# Altium PCB BP_PCB.PcbDoc
Units mil, origin at the board's own origin, x right, y up, seen from the top; angles counter-clockwise.
Board outline 10200 x 7645 mil, 2 copper layers (Top Layer, Bottom Layer); 45 components, 28 nets, 116 pads, 31 vias.
Unrouted connection lines stored in the file: 1.
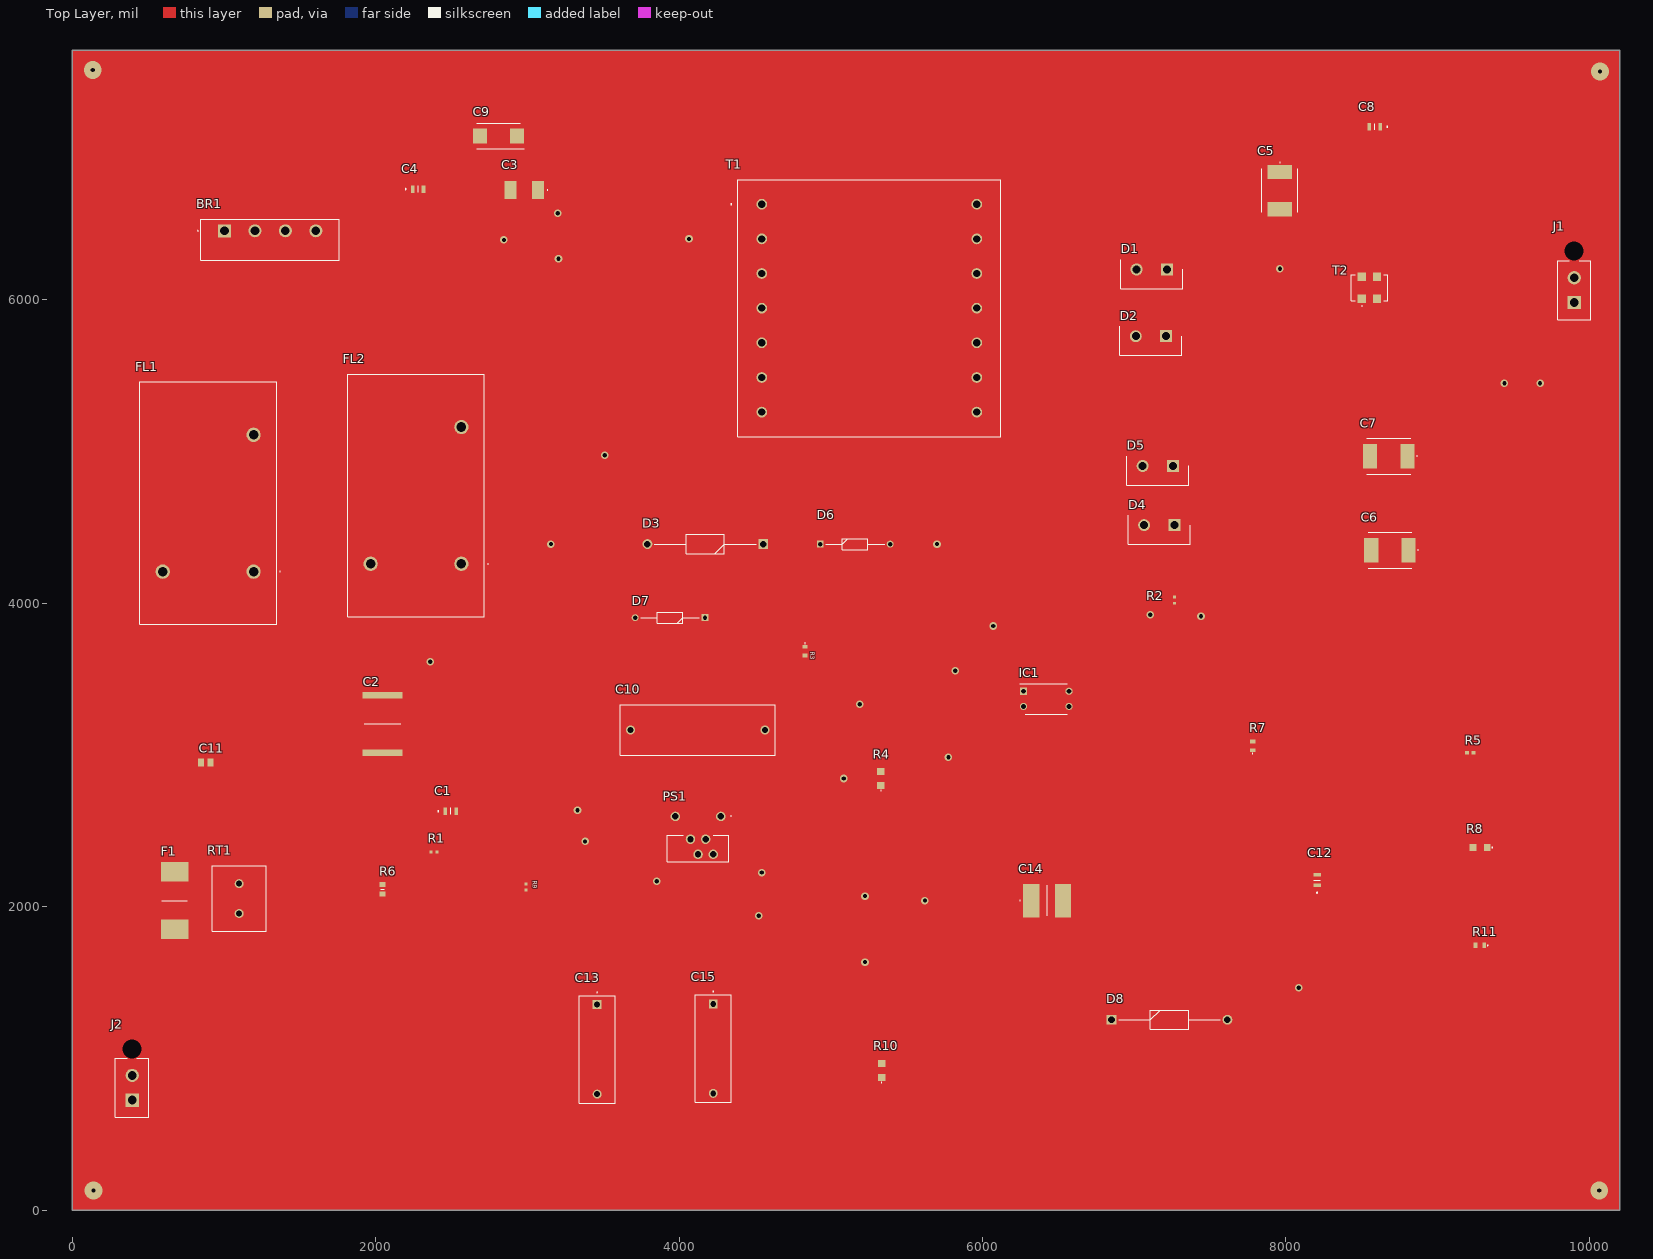
[diagram p0: Top Layer view]
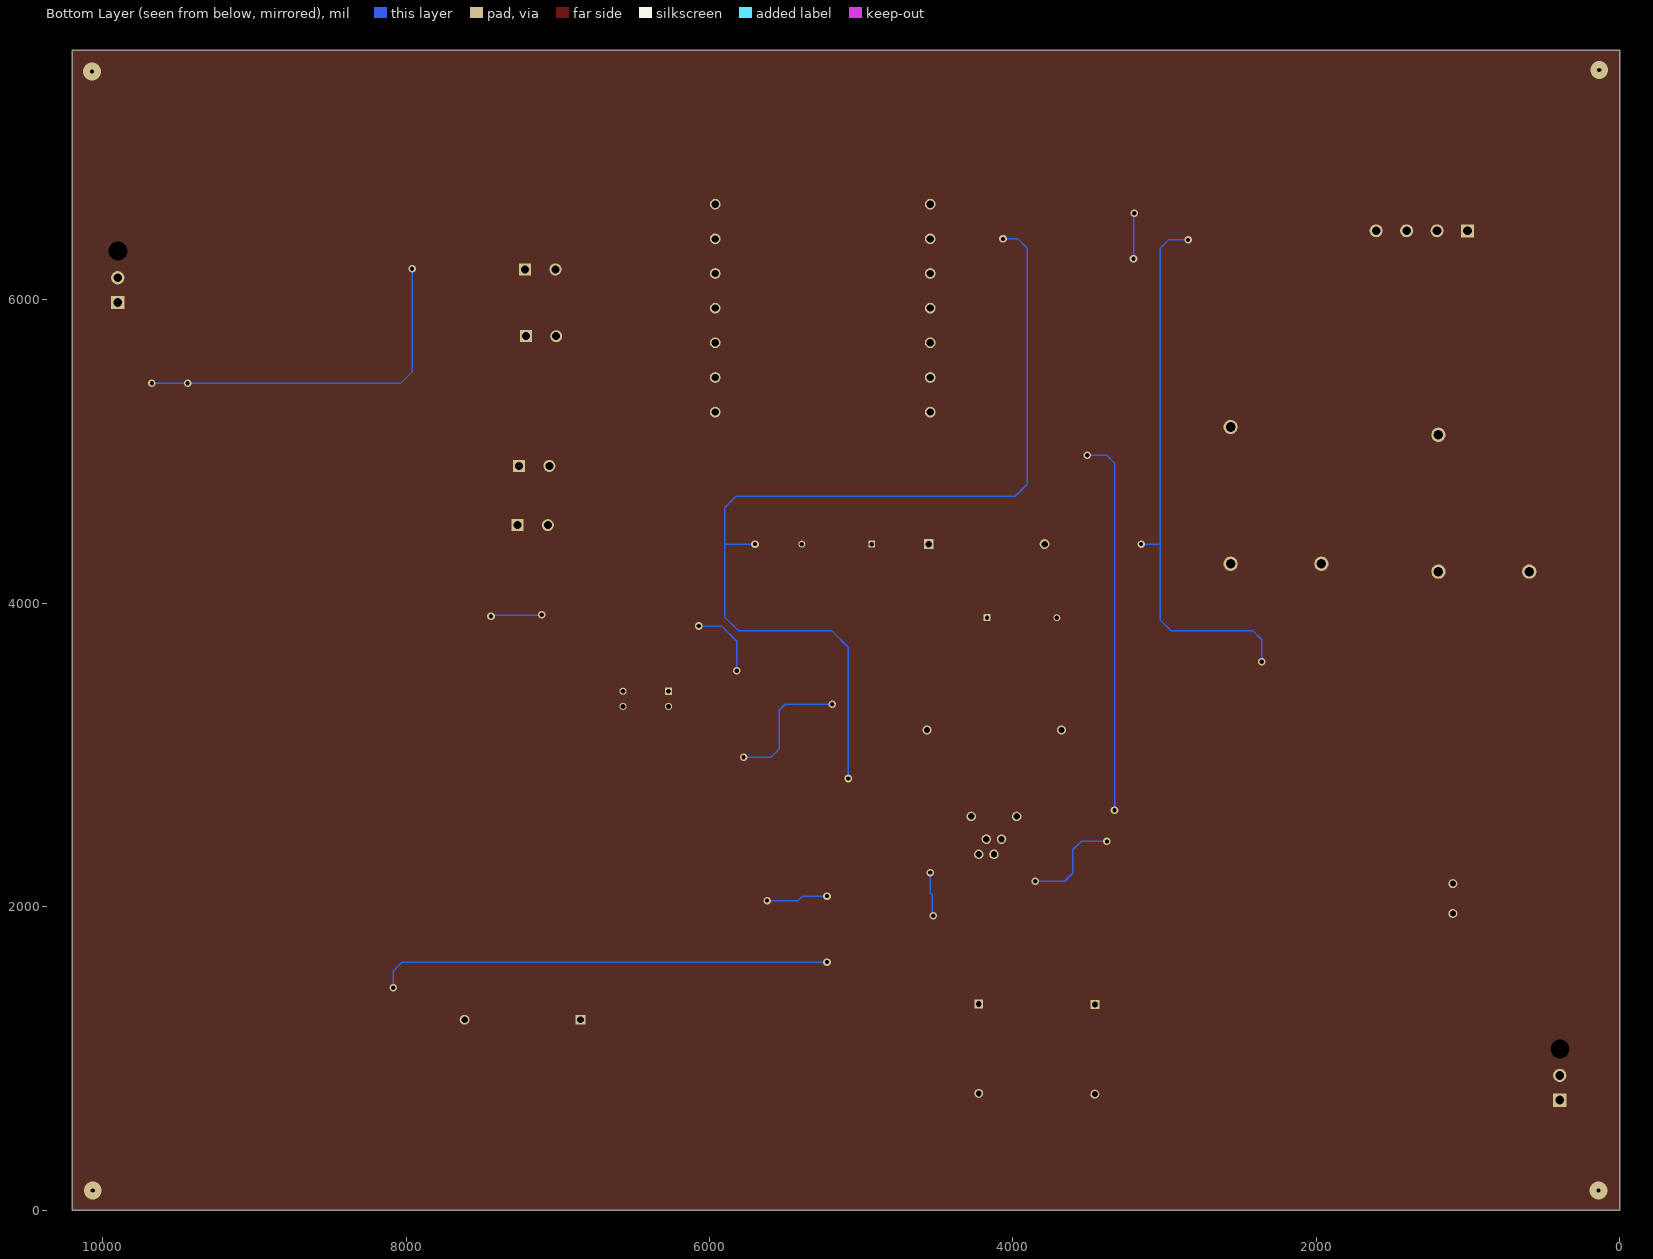
[diagram p1: Bottom Layer view, seen from below]

## Layer stack, top to bottom
Top Solder: solder mask 0.4, Solder Resist, Dk 3.5
Top Layer: signal copper 1.4
Dielectric 1: dielectric 12.6, FR-4, Dk 4.8
Bottom Layer: signal copper 1.4
Bottom Solder: solder mask 0.4, Solder Resist, Dk 3.5

## Board outline
0,0 0,7645 10200,7645 10200,0

## Design rules (kind name [scope] priority, off if disabled: settings)
Clearance [All] p1: gap=10 ignorepadtopadclearanceinfootprint=FALSE
PolygonConnect [All] p1: connectstyle=Relief reliefconductorwidth=10 reliefentries=4 polygonreliefangle="90 Angle" airgapwidth=10
RoutingVias [All] p1: holewidth=28 width=50 viastyle="Through Hole" minholewidth=28 minwidth=50 maxholewidth=28 maxwidth=50
SolderMaskExpansion [All] p1: expansion=4 istentingtop=FALSE
Width [All] p1: maxlimit=10 minlimit=10 preferedwidth=10
30 further rules are at their usual default settings.

## Components (designator, comment, footprint, x,y, rotation, side; value= is the part's Value field where it differs from the comment)
BR1 "RS805-BP" RS805BP 1003.43,6455 r180 top
C1 "2.2nF" GRM21x 2495,2630 r0 top
C2 "0.33uF" CAPC9863X510N 2045,3205 r270 top
C3 "0.022uF" ECHU_E1_E2_E3_E3a_4 2980,6725 r180 top
C4 "0.01uF" GRM21x 2280,6730 r0 top
C5 "820uF" T520H 7960,6720 r270 top
C6 "820uF" T520H 8685,4350 r180 top
C7 "820uF" T520H 8677.17,4970 r180 top
C8 "0.01uF" GRM21x 8585,7140 r180 top
C9 "150uF" CAPPM7343X310N 2810,7080 r180 top
C10 "1uF" ECQE4105KF 3680,3165 r0 top
C11 "0.1uF" CAPC2012X135N 880,2950 r0 top
C12 "0.01uF" GRM21x 8205,2175.43 r90 top
C13 "4.7nF" B32652_(18_x_6) 3460,1355 r270 top
C14 "47uF" KR355WD7LG274MH01L 6425,2040 r0 top
C15 "0.1uF" B32652_(18_x_6) 4225,1360 r270 top
D1 "MBR20100" TO508P485X1018X1930-2P 7215,6200 r180 top
D2 "MBR20100" TO508P485X1018X1930-2P 7210,5760 r180 top
D3 "P6KE200A" DIOAD1936W88L640D324 4555,4390 r180 top
D4 "MBR20100" TO508P485X1018X1930-2P 7265,4515 r180 top
D5 "MBR20100" TO508P485X1018X1930-2P 7255,4905 r180 top
D6 "1N4148,133" DIOAD1165W56L425D185 4930,4390 r0 top
D7 "1N4148,133" DIOAD1165W56L425D185 4170.63,3905 r180 top
D8 "P6KE200A" DIOAD1936W88L640D324 6850,1255 r0 top
F1 "3.15A" FUSC12145X450N 675,2040 r90 top
FL1 "820uH" DMT220038L 1195,4208.43 r90 top
FL2 "200uH" DMT220038L 2565,4260 r90 top
IC1 "PC817A" DIP762W60P254L458H450Q4N 6420,3370 r0 top
J1 "1-770166-0" 17701660 9900,5982.01 r90 top
J2 "1-770166-0" 17701660 395,725 r90 top
PS1 "TOP249YN" TOP249YN 4275,2595 r180 top
R1 "2M" ERA2AED122X 2385,2360 r180 top
R2 "270" ERA2AED122X 7265,4020 r90 top
R3 "4.7" ERA3AEB101V 4830,3685 r270 top
R4 "1k" ERJUP6 5330,2845 r90 top
R5 "31.6K" RESC1005X37N 9215,3015 r0 top
R6 "13MOhm" RESC1608X55N 2045,2115 r90 top
R7 "6.8" ERA3AEB101V 7780,3060 r90 top
R8 "562Ohm" ERJUP6 9280,2390 r180 top
R9 "20.5K" ERA2AED122X 2990,2130 r270 top
R10 "56k" ERJUP6 5335,921.26 r90 top
R11 "4.75K" ERA3AEB101V 9278.54,1745 r180 top
RT1 "10 Ohm" 10D207LD 1100,1955 r90 top
T1 "760895651" 760895651 4545,6630.04 r0 top
T2 "TRS1-182-75-3+" TRS1182753 8550,6080 r90 top

## Footprints (in the part's own frame and the unit in brackets; to place one, negate y for a bottom-side part, rotate by r counter-clockwise, add the part's x,y. Pads: shape width x height; smd on the part's side, far side on the other; paste and mask are expansions set on the pad)
10D207LD [mm]
  round 1.5 hole 1: 1(0,0) 2(5,0)
  silkscreen extent -3,-4.5 8,4.5, body extent -3,-4.5 8,4.5, height 13.1
17701660 [mm]
  rect 2.22x2.22 hole 1.48: 1(0,0)
  round 2.22 hole 1.48: 2(4.14,0)
  round 1.59 hole 3.18 unplated: 3(8.59,0)
  silkscreen extent -2.85,-2.8 6.98,2.8, body extent -4.01,-3.67 9.68,2.68, height 14.29
760895651 [mm]
  round 1.8 hole 1.2: 1(0,0) 2(0,-5.8) 3(0,-11.6) 4(0,-17.4) 5(0,-23.2) 6(0,-29) 7(0,-34.8) 8(36,-34.8) 9(36,-29) 10(36,-23.2) 11(36,-17.4) 12(36,-11.6) 13(36,-5.8) 14(36,0)
  silkscreen extent -5.2,-38.9 40,4.1, body extent -4,-38.9 40,4.1, height 30.1
B32652_(18_x_6) [mm]
  rect 1.5x1.5 hole 1: 1(0,0)
  round 1.5 hole 1: 2(15,0)
  silkscreen extent -2.1,-3 16.5,3, body extent -1.5,-3 16.5,3, height 11.1
CAPC2012X135N [mm]
  rect 0.96x1.39 smd: 1(-0.79,0) 2(0.79,0)
  body extent -1,-0.63 1,0.63, height 1.35
CAPC9863X510N [mm]
  rect 1.1x6.71 smd: 1(-4.81,0) 2(4.81,0)
  silkscreen extent 0,-3.05 0,3.05, body extent -4.55,-3.09 4.55,3.09, height 5.05
CAPPM7343X310N [mm]
  rect 2.35x2.45 smd: 1(-3.1,0) 2(3.1,0)
  silkscreen extent -4.28,-2.15 3.65,2.15, body extent -3.59,-2.21 3.6,2.21, height 2.92
DIOAD1165W56L425D185 [mm]
  rect 1.15x1.15 hole 0.75: 1(0,0)
  round 1.15 hole 0.75: 2(11.7,0)
  silkscreen extent 0.92,-0.92 10.78,0.92, body extent 0.96,1.69 2.67,3.39, height 32.04
DIOAD1936W88L640D324 [mm]
  rect 1.65x1.65 hole 1.1: 1(0,0)
  round 1.65 hole 1.1: 2(19.4,0)
  silkscreen extent 1.17,-1.62 18.23,1.62, body extent -0.38,-1.61 19.78,1.61, height 3.38
DIP762W60P254L458H450Q4N [mm]
  rect 1.2x1.2 hole 0.8: 1(-3.81,1.27)
  round 1.2 hole 0.8: 2(-3.81,-1.27) 3(3.81,-1.27) 4(3.81,1.27)
  silkscreen extent -4.41,-2.54 3.5,2.54, body extent -3.96,-2.29 3.96,2.29, height 4.5
DMT220038L [mm]
  round 2.4 hole 1.6: 1(0,0) 4(0,15.2) MH1(22.9,0)
  silkscreen extent -8.85,-4.5 31.75,19.05, body extent 0,0 0,0
ECHU_E1_E2_E3_E3a_4 [mm]
  rect 2x3 smd: 1(-2.3,0) 2(2.3,0)
  silkscreen extent -3.95,-0.05 -3.85,0.05, body extent -2.4,-1.65 2.4,1.65, height 2
ECQE4105KF [mm]
  round 1.5 hole 1: 1(0,0) 2(22.5,0)
  silkscreen extent -1.75,-4.25 24.25,4.25, body extent -1.75,-4.25 24.25,4.25, height 18.1
ERA2AED122X [mm]
  rect 0.475x0.5 smd: 1(-0.512,0) 2(0.512,0)
  body extent -0.5,-0.25 0.5,0.25, height 0.35
ERA3AEB101V [mm]
  rect 0.65x0.9 smd: 1(-0.725,0) 2(0.725,0)
  silkscreen extent -1.35,-0.05 -1.25,0.05, body extent -0.8,-0.4 0.8,0.4, height 0.45
ERJUP6 [mm]
  rect 1.15x1.25 smd: 1(-1.175,0) 2(1.175,0)
  silkscreen extent -2.07,-0.05 -1.98,0.05, body extent -1,-0.63 1,0.63, height 0.6
FUSC12145X450N [mm]
  rect 3.26x4.61 smd: 1(-4.825,0) 2(4.825,0)
  silkscreen extent 0,-2.15 0,2.15, body extent -6.05,-2.25 6.05,2.25, height 4.5
GRM21x [mm]
  rect 0.6x1.25 smd: 1(-0.9,0) 2(0.9,0)
  silkscreen extent -2.2,-0.53 0,0.53, body extent -1,-0.63 1,0.63, height 1
KR355WD7LG274MH01L [mm]
  rect 2.7x5.6 smd: 1(-2.65,0) 2(2.65,0)
  silkscreen extent -4.55,-2.55 0,2.55, body extent -3.05,-2.65 3.05,2.65, height 6.4
RESC1005X37N [mm]
  rect 0.7x0.6 smd: 1(-0.55,0) 2(0.55,0)
  body extent -0.5,-0.25 0.5,0.25, height 0.32
RESC1608X55N [mm]
  rect 0.9x0.95 smd: 1(-0.8,0) 2(0.8,0)
  silkscreen extent 0,-0.3 0,0.3, body extent -0.8,-0.4 0.8,0.4, height 0.55
RS805BP [mm]
  rect 2.175x2.175 hole 1.45: 1(0,0)
  round 2.175 hole 1.45: 2(-5.1,0) 3(-10.2,0) 4(-15.3,0)
  silkscreen extent -19.25,-1.95 4.5,4.9, body extent -19.25,-1.95 3.95,4.9, height 19.4
T520H [mm]
  rect 2.37x4.13 smd: 1(-3.12,0) 2(3.12,0)
  silkscreen extent -4.77,-3 3.65,3, body extent -3.8,-3.15 3.8,3.15, height 2
TO508P485X1018X1930-2P [mm]
  rect 2.01x2.01 hole 1.34: 1(0,0)
  round 2.01 hole 1.34: 2(5.08,0)
  silkscreen extent -2.65,-1.66 7.73,3.19, body extent -2.55,-1.66 7.63,3.19, height 18.7
TOP249YN [mm]
  round 1.59 hole 1.06: 1(0,0) 2(1.27,6.35) 3(2.54,3.81) 4(3.81,6.35) 5(5.08,3.81) 7(7.62,0)
  silkscreen extent -1.75,-0.1 8.96,7.62, body extent -1.34,-0.43 8.96,7.62, height 17.32
TRS1182753 [mm]
  rect 1.45x1.4 smd: 1(-1.84,1.27) 2(-1.84,-1.27) 3(1.84,-1.27) 4(1.84,1.27)
  silkscreen extent -3.1,-3.05 2.16,3.05, body extent -2.42,-3.05 2.42,3.05, height 4.16

## Part data
BR1: "Bridge Rectifier", Manufacturer_Name=MCC, Datasheet Link=https://www.mccsemi.com/pdf/Products/RS801-RS807(RS-6).pdf, Height=19.3mm, Manufacturer_Part_Number=RS805-BP
C1 C4 C8 C12: library part GRM21A5C2E222FWA1J, "Capacitor", Manufacturer_Name="Murata Electronics", Mouser Part Number=81-RM21A5C2E222FWA1J, Datasheet Link=https://search.murata.co.jp/Ceramy/image/img/A01X/G101/ENG/GRM21A5C2E222FWA1-01.pdf, Height=1.25mm, Manufacturer_Part_Number=GRM21A5C2E222FWA1J, Mouser Price/Stock=https://www.mouser.co.uk/ProductDetail/Murata-Electronics/GRM21A5C2E222FWA1J?qs=81r%252BiQLm7BSiEikPutdFnA%3D%3D
C2: library part ECW-U2334KCV, "Capacitor", Manufacturer_Name=Panasonic, Mouser Part Number=667-ECW-U2334KCV, Datasheet Link=https://4donline.ihs.com/images/VipMasterIC/IC/PANA/PANAS16556/PANAS16556-1.pdf?hkey=52A5661711E402568146F3353EA87419, Height=5.1mm, Manufacturer_Part_Number=ECW-U2334KCV, Mouser Price/Stock=https://www.mouser.co.uk/ProductDetail/Panasonic/ECW-U2334KCV?qs=2eTIFwEe529usYuiaSX9EA%3D%3D
C3: library part ECW-U2223JC9, "Capacitor", Manufacturer_Name=Panasonic, Mouser Part Number=667-ECW-U2223JC9, Datasheet Link=http://industrial.panasonic.com/cdbs/www-data/pdf/RDI0000/ABD0000C176.pdf, Manufacturer_Part_Number=ECW-U2223JC9, Mouser Price/Stock=https://www.mouser.com/Search/Refine.aspx?Keyword=667-ECW-U2223JC9
C5 C6 C7: library part T520H827M010ATE070, "Capacitor Polarised", Manufacturer_Name=KEMET, Mouser Part Number=80-T520H827M010ATE70, Arrow Part Number=T520H827M010ATE070, Arrow Price/Stock=https://www.arrow.com/en/products/t520h827m010ate070/kemet-corporation, Datasheet Link=https://content.kemet.com/datasheets/KEM_T2076_T52X-530.pdf, Height=2mm, Manufacturer_Part_Number=T520H827M010ATE070, Mouser Price/Stock=https://www.mouser.co.uk/ProductDetail/KEMET/T520H827M010ATE070?qs=f9yNj16SXrKlZOF3KavohA%3D%3D
C9: library part 593D157X0010D2TE3, "Capacitor Polarised", Manufacturer_Name=Vishay, Mouser Part Number=74-593D157X0010D2TE3, Datasheet Link=http://www.vishay.com/doc?40005, Height=3.1mm, Manufacturer_Part_Number=593D157X0010D2TE3, Mouser Price/Stock=https://www.mouser.co.uk/ProductDetail/Vishay-Sprague/593D157X0010D2TE3?qs=aQP3sjJQQ7Wdjntmkm5NMA%3D%3D
C10: library part ECQ-E4105KF, "Capacitor", Manufacturer_Name=Panasonic, Mouser Part Number=667-ECQ-E4105KF, Arrow Part Number=ECQ-E4105KF, Arrow Price/Stock=https://www.arrow.com/en/products/ecq-e4105kf/panasonic?region=nac, Datasheet Link=https://industrial.panasonic.com/cdbs/www-data/pdf/RDI0000/ABD0000C179.pdf, Height=18mm, Manufacturer_Part_Number=ECQ-E4105KF, Mouser Price/Stock=https://www.mouser.co.uk/ProductDetail/Panasonic/ECQ-E4105KF?qs=FaGJejDeu%252B%2Fy%2Fa6s5CifsQ%3D%3D
C11: library part MAASU21GSB7104MTCA01, "Capacitor", Manufacturer_Name="TAIYO YUDEN", Mouser Part Number=963-MAASU21GSB7104M, Datasheet Link=https://ds.yuden.co.jp/TYCOMPAS/ap/detail?pn=MAASU21GSB7104MTCA01&u=M, Height=1.35mm, Manufacturer_Part_Number=MAASU21GSB7104MTCA01, Mouser Price/Stock=https://www.mouser.co.uk/ProductDetail/TAIYO-YUDEN/MAASU21GSB7104MTCA01?qs=HFfMDpzxxd3%252BHMM46uQdgg%3D%3D
C13 C15: library part B32652A1472J000, "Capacitor", Manufacturer_Name=TDK, Mouser Part Number=871-B32652A1472J, Datasheet Link=https://product.tdk.com/system/files/dam/doc/product/capacitor/film/mkp_mfp/data_sheet/20/20/db/fc_2009/mkp_b32651_658.pdf, Height=11mm, Manufacturer_Part_Number=B32652A1472J000, Mouser Price/Stock=https://www.mouser.co.uk/ProductDetail/EPCOS-TDK/B32652A1472J000?qs=Ff9BYJREiZ5d5E3KH0oh6g%3D%3D
C14: library part KRM55WR71H476MH13L, "Capacitor", Manufacturer_Name="Murata Electronics", Mouser Part Number=81-KRM55WR71H476MH13, Datasheet Link=https://search.murata.co.jp/Ceramy/image/img/A01X/G101/ENG/KRM55_25V-100V_E.pdf, Manufacturer_Part_Number=KRM55WR71H476MH13L, Mouser Price/Stock=https://www.mouser.co.uk/ProductDetail/Murata-Electronics/KRM55WR71H476MH13L?qs=xZFQr2mActd1GTa%252BXqK0VQ%3D%3D
D1 D2 D4 D5: "Schottky Diode", Manufacturer_Name="SMC Diode Solutions", Datasheet Link=http://www.smc-diodes.com/propdf/MBR20100%20N0759%20REV.B.pdf, Height=4.85mm, Manufacturer_Part_Number=MBR20100
D3 D8: "TVS Diode (Uni-directional)", Manufacturer_Name=STMicroelectronics, Mouser Part Number=511-P6KE200A, Arrow Part Number=P6KE200A, Arrow Price/Stock=https://www.arrow.com/en/products/p6ke200a/stmicroelectronics?region=europe, Datasheet Link=http://www.st.com/web/en/resource/technical/document/datasheet/CD00000720.pdf, Manufacturer_Part_Number=P6KE200A, Mouser Price/Stock=https://www.mouser.co.uk/ProductDetail/STMicroelectronics/P6KE200A?qs=1B3Q%2FtOggyyKpgFymH4LMw%3D%3D
D6 D7: "Diode", Manufacturer_Name=Nexperia, Mouser Part Number=771-1N4148,133, Arrow Part Number=1N4148,133, Arrow Price/Stock=https://www.arrow.com/en/products/1n4148133/nxp-semiconductors, Datasheet Link=https://assets.nexperia.com/documents/data-sheet/1N4148_1N4448.pdf, Manufacturer_Part_Number=1N4148,133, Mouser Price/Stock=https://www.mouser.co.uk/ProductDetail/Nexperia/1N4148133?qs=elmhQ6eFu7hy8ApvpFxPZg%3D%3D
F1: library part 04643.15DR, "Fuse", Manufacturer_Name=LITTELFUSE, Mouser Part Number=576-04643.15DR, Arrow Part Number=04643.15DR, Arrow Price/Stock=https://www.arrow.com/en/products/04643.15dr/littelfuse, Datasheet Link=https://componentsearchengine.com/Datasheets/1/04643.15DR.pdf, Height=4.5mm, Manufacturer_Part_Number=04643.15DR, Mouser Price/Stock=https://www.mouser.com/Search/Refine.aspx?Keyword=576-04643.15DR
FL1 FL2: library part DMT2-200-3.8L, "Filter", Manufacturer_Name=COILCRAFT, Mouser Part Number=994-DMT2-200-3.8L, Datasheet Link=https://componentsearchengine.com/Datasheets/1/DMT2-200-3.8L.pdf, Height=40.6mm, Manufacturer_Part_Number=DMT2-200-3.8L, Mouser Price/Stock=https://www.mouser.co.uk/ProductDetail/Coilcraft/DMT2-200-3.8L?qs=ZYnrCdKdyedAySmgAr651g%3D%3D
IC1: "Integrated Circuit", Manufacturer_Name="Sharp Microelectronics", Datasheet Link=https://pdf1.alldatasheet.com/datasheet-pdf/view/43370/SHARP/PC817A.html, Height=4.5mm, Manufacturer_Part_Number=PC817A
J1 J2: "Connector", Manufacturer_Name="TE Connectivity", Mouser Part Number=571-1-770166-0, Arrow Part Number=1-770166-0, Arrow Price/Stock=https://www.arrow.com/en/products/1-770166-0/te-connectivity?region=europe, Datasheet Link=https://www.te.com/commerce/DocumentDelivery/DDEController?Action=showdoc&DocId=Customer+Drawing%7F770166%7FM%7Fpdf%7FEnglish%7FENG_CD_770166_M.pdf%7F1-770166-0, Height=14.25mm, Manufacturer_Part_Number=1-770166-0, Mouser Price/Stock=https://www.mouser.co.uk/ProductDetail/TE-Connectivity-AMP/1-770166-0?qs=m8myXnDJXpW%252BZqFFniy0cw%3D%3D
PS1: "Power Supply", Manufacturer_Name="Power Integrations", Mouser Part Number=869-TOP249YN, Datasheet Link=https://www.power.com/sites/default/files/product-docs/top242.250.pdf, Height=17.22mm, Manufacturer_Part_Number=TOP249YN, Mouser Price/Stock=https://www.mouser.co.uk/ProductDetail/Power-Integrations/TOP249YN?qs=ulE8k0yEMYa9hxpa6dExag%3D%3D
R1 R2: library part ERA-2ARB271X, "Resistor", Manufacturer_Name=Panasonic, Mouser Part Number=667-ERA-2ARB271X, Datasheet Link=http://industrial.panasonic.com/cdbs/www-data/pdf/RDM0000/AOA0000C307.pdf, Height=0.4mm, Manufacturer_Part_Number=ERA-2ARB271X, Mouser Price/Stock=https://www.mouser.co.uk/ProductDetail/Panasonic/ERA-2ARB271X?qs=6%252Bc%252B2ke79U5NvXLur4mWNw%3D%3D
R3 R7 R11: library part ERA-3ARB4751V, "Resistor", Manufacturer_Name=Panasonic, Mouser Part Number=667-ERA-3ARB4751V, Datasheet Link=https://industrial.panasonic.com/cdbs/www-data/pdf/RDM0000/AOA0000C307.pdf, Height=0.55mm, Manufacturer_Part_Number=ERA-3ARB4751V, Mouser Price/Stock=https://www.mouser.com/Search/Refine.aspx?Keyword=667-ERA-3ARB4751V
R4 R8 R10: library part ERJ-UP6F5620V, "Resistor", Manufacturer_Name=Panasonic, Datasheet Link=https://industrial.panasonic.com/cdbs/www-data/pdf/RDP0000/AOA0000C337.pdf, Height=0.7mm, Manufacturer_Part_Number=ERJ-UP6F5620V
R5: library part MCS04020C3162FE000, "Resistor", Manufacturer_Name=Vishay, Datasheet Link=http://www.vishay.com/docs/28705/mcx0x0xpro.pdf, Height=0.37mm, Manufacturer_Part_Number=MCS04020C3162FE000
R6: library part RK73B1JTTDD136J, "Resistor", Manufacturer_Name="KOA Speer", Mouser Part Number=660-RK73B1JTTDD136J, Datasheet Link=http://www.koaspeer.com/catimages/Products/RK73-RT/RK73-RT.pdf, Height=0.55mm, Manufacturer_Part_Number=RK73B1JTTDD136J, Mouser Price/Stock=https://www.mouser.com/Search/Refine.aspx?Keyword=660-RK73B1JTTDD136J
R9: library part ERA-2ARB2052X, "Resistor", Manufacturer_Name=Panasonic, Datasheet Link=http://industrial.panasonic.com/cdbs/www-data/pdf/RDM0000/AOA0000C307.pdf, Height=0.4mm, Manufacturer_Part_Number=ERA-2ARB2052X
RT1: library part 10D2-07LD, "Thermistor", Manufacturer_Name=Semitec, Mouser Part Number=954-10D2-07LD, Datasheet Link=https://componentsearchengine.com/Datasheets/1/10D2-07LD.pdf, Height=13mm, Manufacturer_Part_Number=10D2-07LD, Mouser Price/Stock=https://www.mouser.co.uk/ProductDetail/Semitec/10D2-07LD?qs=wgO0AD0o1vtdKrBfLLBq%2FA%3D%3D
T1: "Transformer", Manufacturer_Name="Wurth Elektronik", Mouser Part Number=710-760895651, Datasheet Link=https://www.we-online.com/catalog/datasheet/760895651.pdf, Height=30mm, Manufacturer_Part_Number=760895651, Mouser Price/Stock=https://www.mouser.co.uk/ProductDetail/Wurth-Elektronik/760895651?qs=AAveGqk956G8CHeQSeSJ0w%3D%3D
T2: "Transformer", Manufacturer_Name=Mini-Circuits, Mouser Part Number=139-TRS1-182-75-3+, Datasheet Link=https://www.minicircuits.com/WebStore/dashboardPdf?model=TRS1-182-75-3%2B, Height=4.06mm, Manufacturer_Part_Number=TRS1-182-75-3+, Mouser Price/Stock=https://www.mouser.co.uk/ProductDetail/Mini-Circuits/TRS1-182-75-3%2b?qs=Imq1NPwxi744LVUjBx3ybQ%3D%3D

## Via types
v1: diameter 50, hole 28, Top Layer to Bottom Layer, 27 vias
v2: diameter 118, hole 28, Top Layer to Bottom Layer, 3 vias
v3: diameter 118.11, hole 28, Top Layer to Bottom Layer, 1 vias

## Nets (pads, with @x,y where several pads share a name; then routed paths per layer and width w, separated by ;. In a path a pad name is that pad's centre, name@x,y a point inside that pad or via, vN(x,y) a via of type N, cw(c..) or ccw(c..) an arc to the next point about the centre after c; other vN are vias at no path point)
GND: T1.4 T1.5 T1.6 T1.7 T1.8 T1.9
NetBR1_1: BR1.1 C1.1 C2.2 C3.2 C4.2 C9.2 D3.2 R1.2 R6.2 T1.1 | length 14163.2
  Top Layer w10: BR1.1 1003.43,6668.43 1065,6730 1950,6730 ; C2.2 2045,2630 ; R6.2@2056.3,2139.21 2056.3,2140.2 2045,2151.5 2045,2360 ; C4.2@2310.43,6730 2524.14,6730 ; v1(2360,3615) 2360,2965 2252.28,2857.28 2252.28,2630 ; R1.2 2045,2360 ; C1.1 2252.28,2630 ; C9.2 2530,7080 ; v1(2845,6395) 2035,6395 1950,6480 1950,6730 ; C3.2 2884.45,6730 2524.14,6730 ; v1@3150,4395 v1(3155,4390) D3.2 ; T1.1 3634.96,6630.04 3550,6715 3550,7280 3485,7345 2585,7345 2530,7290 2530,7080 ; 1950,6730 1950,7010 2020,7080 2530,7080 ; 2045,2360 2045,2630 ; 2045,2630 2252.28,2630 ; 2524.14,6730 2530,6735.86 2530,7080
  Bottom Layer w10: v1(2360,3615) 2360,3760 2420,3820 2960,3820 3030,3890 3030,4395 ; v1(2845,6395) 2975,6395 3030,6340 3030,4395 ; v1(3155,4390) 3035,4390 3030,4395
NetBR1_2: BR1.2 BR1.3 FL1.MH1 | length 1949.4
  Top Layer w10: FL1.MH1 1199.61,5114.61 1199.61,6450.39 BR1.2 1204.21,6634.21 1250,6680 1365,6680 1405,6640 BR1.3
NetBR1_4: BR1.4 FL2.MH1 | length 2191.6
  Top Layer w10: BR1.4 1605.79,6129.21 1645,6090 2500,6090 2565,6025 FL2.MH1
NetC1_2: C1.2 C6.1 C7.1 T1.11 T1.13 T2.2 | length 15613
  Top Layer w10: C1.2 3325,2630 v1(3330,2635) ; v1@3495,4970 5625,4970 5730,5075 5730,6010 ; T1.13 5791.69,6401.69 5730,6340 5730,6010 ; v1(7105,3925) 6575,3925 6500,4000 6500,5860 6415,5945 T1.11 5952.32,5955 5785,5955 5730,6010 ; v1(7440,3915) 9010,3915 9145,4050 9145,4350 ; T2.2 8605,6002.56 8605,5660 8695,5570 9080,5570 9145,5505 9145,4970 ; C7.1 9145,4970 ; C6.1 9145,4350 ; 9145,4350 9145,4970
  Bottom Layer w10: v1(3330,2635) 3330,4925 3380,4975 v1(3510,4975) ; v1(7105,3925) 7110,3920 7435,3920 v1(7440,3915)
NetC2_1: C2.1 C3.1 C9.1 C10.1 C12.1 C14.1 FL2.4 PS1.4 PS1.5 R9.1 T1.3 | length 17813.6
  Top Layer w10: FL2.4 1966.57,3823.43 2045,3745 ; C2.1 2045,3745 ; C9.1 3295,7080 3325,7050 3325,6725 ; R9.1 2990,2230 3105,2345 3695,2345 ; C3.1 3325,6725 ; C10.1 2940,3165 ; PS1.5 3695,2445 ; PS1.4 3695,2345 ; T1.3 3921.65,6173.35 3875,6220 3875,6425 3825,6475 3325,6475 ; v1(5225,2070) 3765.86,2070 3695,2140.86 3695,2345 ; v1(5620,2040) 5900,2040 ; C14.1 5900,2040 ; C12.1 8205,1815 8120,1730 5980,1730 5900,1810 5900,2040 ; 2045,3745 2940,3745 ; 2940,3165 2940,2825 3005,2760 3600,2760 3695,2665 3695,2445 ; 2940,3165 2940,3745 ; 2940,3745 2940,6410 3005,6475 3325,6475 ; 3325,6475 3325,6725 ; 3695,2345 3695,2445
  Bottom Layer w10: v1(5225,2070) 5385,2070 5415,2040 v1(5620,2040)
NetC4_1: C4.1 D3.1 D6.1 | length 5464
  Top Layer w10: C4.1 2145,6730 2080,6665 2080,6550 2145.32,6484.68 2799.68,6484.68 2880,6565 v1@3210,6565 ; v1(3205,6270) 3205,4960 3325,4840 4645,4840 4742.5,4742.5 4742.5,4390 ; D3.1 4742.5,4390 ; D6.1 4742.5,4390
  Bottom Layer w10: v1(3200,6570) 3202.5,6567.5 3202.5,6272.5 v1(3205,6270)
NetC5_1: C5.1 C8.1 C15.1 D8.2 J1.2 R8.1 R11.1 R11.2 T2.3 | length 16219.3
  Top Layer w10: C15.1 4225,1565 4295,1635 v1(5225,1635) ; D8.2 8090,1255 ; C5.1 7960,7340 8030,7410 8880,7410 8950,7340 8950,7140 ; v1(8085,1465) 8090,1460 8090,1255 ; T2.3 8600,6655 8645,6700 8945,6700 8950,6705 ; C8.1 8625.43,7135 8945,7135 8950,7140 ; R11.2 8950,1745 8880,1675 8880,1330 8805,1255 8090,1255 ; R11.1 9510,1745 9580,1815 9580,2390 9580,2395 ; R8.1 9575,2390 9580,2395 ; J1.2 9895,6150 9580,6150 ; 8950,6705 8950,7135 8950,7140 ; 8950,6705 8950,6700 8950,6235 9035,6150 9580,6150 ; 9580,2395 9580,6150
  Bottom Layer w10: v1(5225,1635) 8025,1635 8085,1575 v1(8085,1465)
NetC5_2: C5.2 C8.2 J1.1 R5.2 T2.4 | length 8139.4
  Top Layer w10: v1(7960,6205) 7960,6335 ; C5.2 7960,6335 ; T2.4 8500,6335 ; C8.2 8300,7140 8255,7095 8255,6755 8305,6705 8455,6705 8500,6660 8500,6335 ; R5.2 9385,3015 9445,3075 v1@9445,5462.34 ; v1(9675,5450) 9675,5910 9747.01,5982.01 J1.1 ; 7960,6335 8500,6335
  Bottom Layer w10: v1(7960,6205) 7960,5525 8035.86,5449.14 8728.26,5449.14 8729.12,5450 v1(9440,5450) v1(9675,5450)
NetC6_2: C6.2 C7.2 D1.1 D2.1 D4.1 D5.1 R2.2 T2.1 | length 6729
  Top Layer w10: D1.1 7215,5765 D2.1 7210,5415 7255,5370 7255,4970 ; R2.2 D4.1 7265,4895 D5.1 7255,4970 ; T2.1 8500,5655 8415,5570 7770,5570 7670,5470 7670,4970 ; C7.2 7670,4970 ; C6.2 7715,4350 7670,4395 7670,4970 ; 7255,4970 7670,4970
NetC10_2: C10.2 IC1.4 R3.2 | length 3257
  Top Layer w10: C10.2 4770,3165 4830,3225 4830,3510 ; R3.2 4830,3510 ; IC1.4 6575,3415 6815,3415 6875,3475 6875,3560 6810,3625 5405,3625 5290,3510 4830,3510
NetC11_1: C11.1 F1.2 FL1.4 | length 2184.8
  Top Layer w10: FL1.4 596.57,3723.43 675,3645 675,2950 ; F1.2 675,2950 ; C11.1 675,2950
NetC11_2: C11.2 FL1.1 RT1.2 | length 2284.8
  Top Layer w10: C11.2 1100,2950 ; RT1.2 1100,2950 ; FL1.1 1195,3745 1100,3650 1100,2950
NetC12_2: C12.2 IC1.3 PS1.1 R7.2 | length 6821.8
  Top Layer w10: PS1.1 5085,2595 5180,2690 5180,3320 v1@5190,3330 ; v1@5770,2990 v1(5775,2985) 5780,2980 6840,2980 6890,3030 6890,3320 ; IC1.3 6890,3320 ; R7.2 7785,3093.54 7785,3320 ; C12.2 8200,2215.87 8200,3225 8105,3320 7785,3320 ; 6890,3320 7785,3320
  Bottom Layer w10: v1(5190,3335) 5500,3335 5540,3295 5540,3040 5595,2985 v1(5775,2985)
NetC13_1: C13.1 D8.1 IC1.2 R4.1 R10.2 | length 7220.3
  Top Layer w10: C13.1 3460,1695 3575,1810 5330,1810 5335,1805 ; R4.1 5335,2793.74 5335,2600 ; R10.2 5335,1250 ; IC1.2 5735,3320 5700,3285 5700,2650 5650,2600 5335,2600 ; D8.1 6845,1250 5335,1250 ; 5335,1250 5335,1805 ; 5335,1805 5335,1810 5335,2600
NetC13_2: C13.2 C15.2 R10.1 | length 3104.7
  Top Layer w10: C13.2 3460,465 3570,355 4225,355 ; C15.2 4225,355 ; R10.1 5335,440 5250,355 4225,355
NetC14_2: C14.2 R7.1 | length 2127
  Top Layer w10: C14.2 7580,2040 7780,2240 7780,3026.46 R7.1@7775,3031.46
NetD1_2: D1.2 D2.2 T1.14 | length 1863.3
  Top Layer w10: T1.14 6909.96,6630.04 7010,6530 7010,6205 D1.2 7012.5,6197.5 7012.5,5762.5 D2.2
NetD4_2: D4.2 D5.2 T1.12 | length 2624.3
  Top Layer w10: T1.12 6501.65,6173.35 6560,6115 6560,5555 6645,5470 6975,5470 7055,5390 D5.2 7060,4900 7060,4520 D4.2
NetD6_2: D6.2 PS1.7 T1.2 | length 8591.3
  Top Layer w10: PS1.7 3975,2775 4045,2845 v1(5085,2845) ; v1(4065,6401.69) T1.2 ; D6.2 v1(5700,4390)
  Bottom Layer w10: v1(4065,6401.69) 3966.69,6401.69 3905,6340 3905,4785 3985,4705 5825,4705 5900,4630 5900,4390 5900,3910 5810,3820 5195,3820 5085,3710 v1(5085,2845) ; v1(5700,4390) 5899.14,4390 5900,4390.86
NetD7_1: D7.1 R3.1 | length 821.5
  Top Layer w10: D7.1 4780,3905 4830,3855 R3.1
NetD7_2: D7.2 T1.10 | length 5439.5
  Top Layer w10: D7.2 3465,3905 3370,4000 3370,4185 3369.14,4185.86 3433.28,4250 6310,4250 6408.35,4348.35 6408.35,5636.65 6328.35,5716.65 T1.10
NetF1_1: F1.1 J2.2 | length 1202.8
  Top Layer w17: J2.2 607.99,887.99 675,955 F1.1
NetIC1_1: IC1.1 R2.1 R4.2 | length 3348.3
  Top Layer w10: R4.2 5330,3315 5435,3420 5820,3420 ; v1@5820,3565 v1(5820,3555) 5820,3420 ; v1(6070,3850) 7205,3850 7265,3910 R2.1 ; IC1.1 5820,3420
  Bottom Layer w10: v1(5820,3555) 5820,3750 5920,3850 v1(6070,3850)
NetJ2_1: J2.1 RT1.1 | length 1894
  Top Layer w17: J2.1 1030,725 1100,795 RT1.1
NetPS1_2: PS1.2 R1.1 | length 2206.6
  Top Layer w10: R1.1 2990,2360 3060,2430 v1(3380,2430) ; v1@3850,2170 v1(3852.5,2167.5) 3855,2165 4180,2165 4225,2210 PS1.2
  Bottom Layer w10: v1(3380,2430) 3550,2430 3605,2375 3605,2220 3657.5,2167.5 v1(3852.5,2167.5)
NetPS1_3: PS1.3 R6.1 R9.2 | length 3862.3
  Top Layer w10: R6.1 2045,1930 2145,1830 2985,1830 ; R9.2 2990,1835 2985,1830 ; PS1.3 4505,2445 4545,2405 v1(4545,2225) ; v1(4525,1940) 3550,1940 3440,1830 2985,1830
  Bottom Layer w10: v1(4525,1940) 4530,1945 4530,2075 4545,2090 v1(4545,2225)
NetR5_1: R5.1 R8.2 | length 1043.9
  Top Layer w10: R5.1@9193.35,3010 9188.35,3015 9020,3015 8970,2965 8970,2460 9040,2390 R8.2
pads on no net: FL2.1 J1.3 J2.3
copper on no net:
  other v2: 10065,130 10070,7505 135,7515
  other v3: 140,130

## Other copper
Top Layer:
  rectangle net GND: 0,0 10200,7645
  text "MCST" at 8950,515 h60
Bottom Layer:

## Silkscreen, mask and mechanical layers (free items; w line width, h text height)
Mechanical 1:
  the board outline again, w10
Mechanical 15:
  text "MCST" at 9065,285 h180